# Altium PCB TS100C.PcbDoc
Units mm, origin at the board's own origin, x right, y up, seen from the top; angles counter-clockwise.
Board outline 144.27 x 66.42 mm, 2 copper layers (Top Layer, Bottom Layer); 63 components, 45 nets, 253 pads, 49 vias.
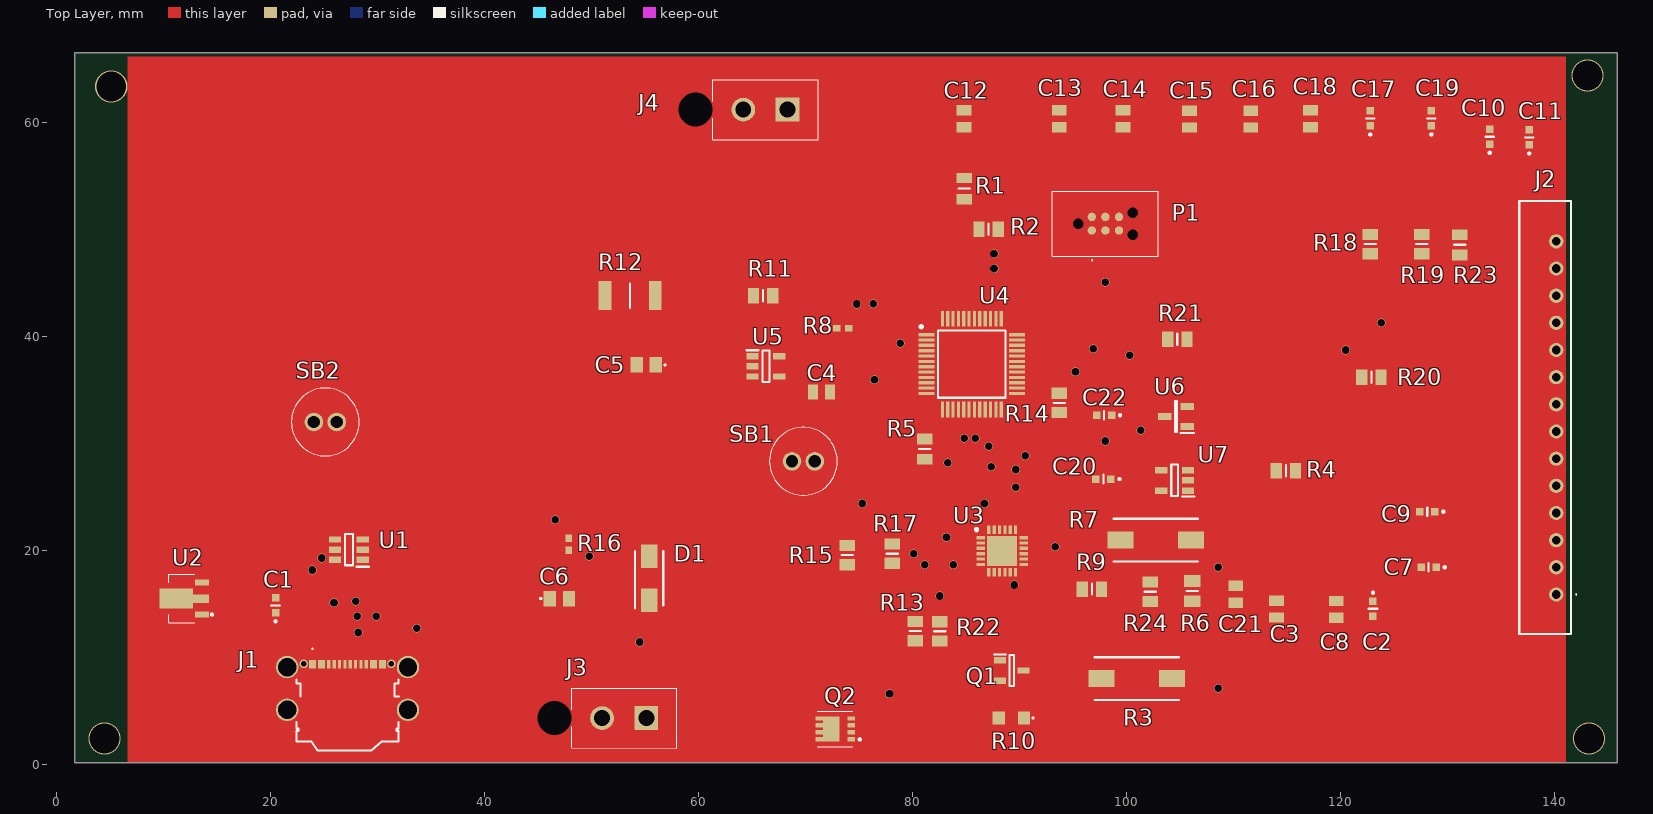
[diagram p0: Top Layer view]
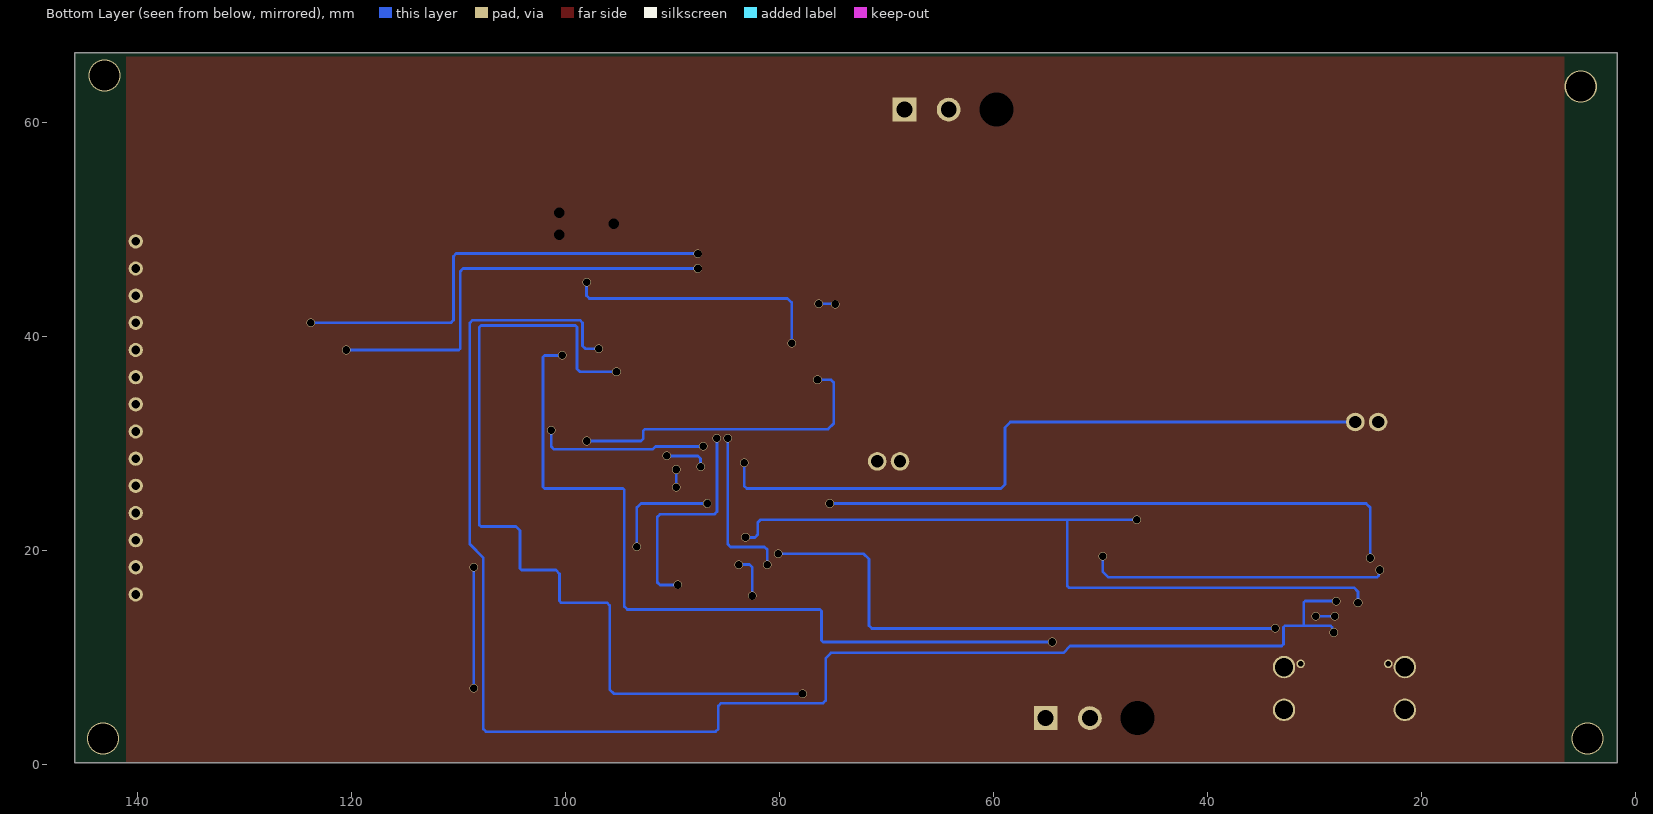
[diagram p1: Bottom Layer view, seen from below]
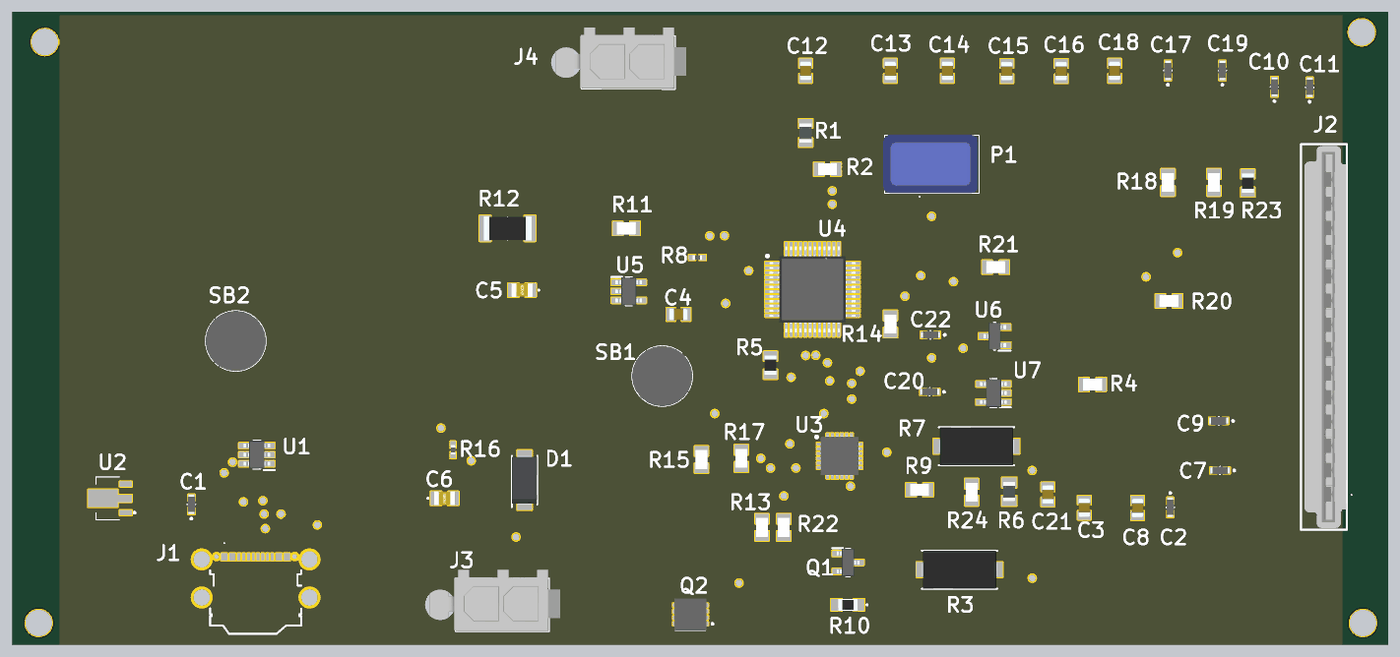
[diagram p2: 3D render of the assembled board from above, using the file's embedded part models]

## Layer stack, top to bottom
Top Solder: solder mask 0.0102, Solder Resist, Dk 3.5
Top Layer: signal copper 0.0356
Dielectric 1: dielectric 0.32, FR-4, Dk 4.8
Bottom Layer: signal copper 0.0356
Bottom Solder: solder mask 0.0102, Solder Resist, Dk 3.5

## Board outline
1.651,0.127 1.651,66.548 145.923,66.548 145.923,0.127

## Design rules (kind name [scope] priority, off if disabled: settings)
Clearance [All] p1: gap=0.254 ignorepadtopadclearanceinfootprint=FALSE
PolygonConnect [All] p1: connectstyle=Relief reliefconductorwidth=0.254 reliefentries=4 polygonreliefangle="90 Angle" airgapwidth=0.254
RoutingVias [All] p1: holewidth=0.711 width=1.27 viastyle="Through Hole" minholewidth=0.711 minwidth=1.27 maxholewidth=0.711 maxwidth=1.27
SolderMaskExpansion [All] p1: expansion=0.102 istentingtop=FALSE
Width [All] p1: maxlimit=0.254 minlimit=0.254 preferedwidth=0.254
30 further rules are at their usual default settings.

## Components (designator, comment, footprint, x,y, rotation, side; value= is the part's Value field where it differs from the comment)
C1 "MAJCT168BB7105KTEA01" MAJx16 20.447,14.859 r90 top
C2 "MAJCT168BB7105KTEA01" MAJx16 123.063,14.543 r270 top
C3 "MAASU21GSB7104MTCA01" CAPC2012X135N 114.046,14.506 r270 top
C4 "MAASU21GSB7104MTCA01" CAPC2012X135N 71.501,34.798 r0 top
C5 "C0805C180JAGACTU" C0805 55.107,37.338 r180 top
C6 "C0805C180JAGACTU" C0805 46.99,15.494 r0 top
C7 "MAJCT168BB7105KTEA01" MAJx16 128.27,18.415 r180 top
C8 "MAASU21GSB7104MTCA01" CAPC2012X135N 119.634,14.478 r270 top
C9 "MAJCT168BB7105KTEA01" MAJx16 128.143,23.622 r180 top
C10 "MAJCT168BB7105KTEA01" MAJx16 133.985,58.674 r90 top
C11 "MAJCT168BB7105KTEA01" MAJx16 137.668,58.612 r90 top
C12 "MAASU21GSB7104MTCA01" CAPC2012X135N 84.836,60.353 r270 top
C13 "MAASU21GSB7104MTCA01" CAPC2012X135N 93.726,60.353 r270 top
C14 "MAASU21GSB7104MTCA01" CAPC2012X135N 99.695,60.353 r270 top
C15 "MAASU21GSB7104MTCA01" CAPC2012X135N 105.918,60.325 r270 top
C16 "MAASU21GSB7104MTCA01" CAPC2012X135N 111.633,60.325 r270 top
C17 "MAJCT168BB7105KTEA01" MAJx16 122.809,60.39 r90 top
C18 "MAASU21GSB7104MTCA01" CAPC2012X135N 117.221,60.353 r270 top
C19 "MAJCT168BB7105KTEA01" MAJx16 128.524,60.39 r90 top
C20 "MAJCT168BB7105KTEA01" MAJx16 97.852,26.67 r180 top
C21 "MAASU21GSB7104MTCA01" CAPC2012X135N 110.236,15.903 r90 top
C22 "MAJCT168BB7105KTEA01" MAJx16 97.917,32.639 r180 top
D1 "B140-E3_61T" DIOM5127X229N 55.372,17.399 r90 top
J1 "USB4720-03-A" USB472003A 27.178,5.334 r0 top
J2 "6-520315-4" 65203154 140.208,15.875 r90 top
J3 "1-770166-0" 17701660 55.118,4.318 r180 top
J4 "1-770166-0" 17701660 68.326,61.214 r180 top
P1 "TC2030-CTX-NL" TC2030MCPNL10 98.044,50.345 r0 top
Q1 "SS8050-G" SOT95P240X115-3N 89.281,8.763 r0 top
Q2 "DMP3017SFG-7" DMP3007SFG7 72.771,3.302 r90 top
R1 "WSL080500000ZEA9" RESC2013X84N 84.836,53.832 r270 top
R2 "RN73C2A2K37BTG" RESC2012X65N 87.122,50.038 r0 top
R3 "SMQW133RJT" RESM7940X385N 100.965,8.001 r0 top
R4 "RN73C2A2K37BTG" RESC2012X65N 114.924,27.432 r0 top
R5 "CRCW0805560KJNEAHP" RESC2012X60N 81.153,29.464 r270 top
R6 "WSLP0805R0100DEA" RESC2013X58N 106.172,16.19 r270 top
R7 "SMQW133RJT" RESM7940X385N 102.743,20.955 r0 top
R8 "SFR01MZPF1003" RESC1005X40N 73.491,40.767 r0 top
R9 "RN73C2A2K37BTG" RESC2012X65N 96.774,16.383 r0 top
R10 "ERJ-UP6D20R0V" ERJUP6 89.249,4.318 r180 top
R11 "RN73C2A2K37BTG" RESC2012X65N 66.04,43.815 r180 top
R12 "RCV2010750KFKEFAT" RESC5025X70N 53.594,43.815 r180 top
R13 "RN73C2A2K37BTG" RESC2012X65N 80.264,12.446 r270 top
R14 "RN73C2A2K37BTG" RESC2012X65N 93.726,33.782 r270 top
R15 "RN73C2A2K37BTG" RESC2012X65N 73.914,19.558 r90 top
R16 "SFR01MZPF1003" RESC1005X40N 47.879,20.574 r270 top
R17 "RN73C2A2K37BTG" RESC2012X65N 78.105,19.685 r90 top
R18 "RN73C2A2K37BTG" RESC2012X65N 122.809,48.641 r90 top
R19 "RN73C2A2K37BTG" RESC2012X65N 127.635,48.641 r90 top
R20 "RN73C2A2K37BTG" RESC2012X65N 122.925,36.195 r180 top
R21 "RN73C2A2K37BTG" RESC2012X65N 104.764,39.751 r0 top
R22 "RN73C2A2K37BTG" RESC2012X65N 82.55,12.435 r270 top
R23 "CRCW0805560KJNEAHP" RESC2012X60N 131.191,48.575 r270 top
R24 "RN73C2A2K37BTG" RESC2012X65N 102.235,16.129 r90 top
SB1 "8631CQD2" 8631CQD2 68.736,28.321 r0 top
SB2 "8631CQD2" 8631CQD2 24.032,32.004 r0 top
U1 "USBLC6-4SC6" SOT95P280X145-6N 27.305,20.066 r180 top
U2 "AP2204R-3.3TRG1" AP2204R33TRG1 12.899,15.494 r90 top
U3 "STUSB4500QTR" QFN50P400X400X100-25N-D 88.392,19.939 r0 top
U4 "STM32F072C8T6" QFP50P900X900X160-48N 85.551,37.421 r0 top
U5 "OPA340NA" SOT95P280X145-5N 66.294,37.211 r0 top
U6 "MCP9700T-H_TTVAO" SOT95P237X112-3N 104.648,32.512 r180 top
U7 "SI8540-B-FWR" SOT95P280X145-5N 104.521,26.543 r180 top

## Footprints (in the part's own frame and the unit in brackets; to place one, negate y for a bottom-side part, rotate by r counter-clockwise, add the part's x,y. Pads: shape width x height; smd on the part's side, far side on the other; paste and mask are expansions set on the pad)
8631CQD2 [mm]
  round 1.74 hole 1.16: 1(0,0) 2(2.13,0)
  silkscreen extent -2.11,-3.17 4.24,3.17, body extent -2.11,-3.17 4.24,3.17, height 14.03
17701660 [mm]
  rect 2.22x2.22 hole 1.48: 1(0,0)
  round 2.22 hole 1.48: 2(4.14,0)
  round 1.59 hole 3.18 unplated: 3(8.59,0)
  silkscreen extent -2.85,-2.8 6.98,2.8, body extent -4.01,-3.67 9.68,2.68, height 14.29
65203154 [mm]
  round 1.333 hole 0.82: 1(0,0) 2(2.54,0) 3(5.08,0) 4(7.62,0) 5(10.16,0) 6(12.7,0) 7(15.24,0) 8(17.78,0) 9(20.32,0) 10(22.86,0) 11(25.4,0) 12(27.94,0) 13(30.48,0) 14(33.02,0)
  silkscreen extent -3.68,-1.9 36.78,3.46, body extent -3.49,-1.32 36.59,3.08, height 9.1
AP2204R33TRG1 [mm]
  rect 0.55x1.3 smd: 1(-1.5,-0.665) 3(1.5,-0.665)
  rect 0.8x1.475 smd: 2(0,-0.578)
  rect 1.85x3.125 smd: 4(0,1.723)
  silkscreen extent -2.25,-1.7 2.25,2.45
C0805 [mm]
  rect 1.15x1.45 smd: 1(-0.9,0) 2(0.9,0)
  silkscreen extent -1.8,-0.05 -1.7,0.05, body extent -1.1,-0.73 1.1,0.72, height 0.88
CAPC2012X135N [mm]
  rect 0.96x1.39 smd: 1(-0.79,0) 2(0.79,0)
  body extent -1,-0.63 1,0.63, height 1.35
DIOM5127X229N [mm]
  rect 2.2x1.55 smd: 1(-2.05,0) 2(2.05,0)
  silkscreen extent -2.83,-1.33 2.55,1.33, body extent -2.55,-1.33 2.55,1.33, height 2.29
DMP3007SFG7 [mm]
  rect 0.42x0.7 smd: 1(-0.975,-1.5) 2(-0.325,-1.5) 3(0.325,-1.5) 4(0.975,-1.5) 5(0.975,1.5) 6(0.325,1.5) 7(-0.325,1.5) 8(-0.975,1.5)
  rect 2.37x1.55 smd: 9(0,0.375)
  silkscreen extent -1.65,-2.4 1.65,1.65, body extent -1.68,-1.68 1.68,1.68, height 0.71
ERJUP6 [mm]
  rect 1.15x1.25 smd: 1(-1.175,0) 2(1.175,0)
  silkscreen extent -2.07,-0.05 -1.98,0.05, body extent -1,-0.63 1,0.63, height 0.6
MAJx16 [mm]
  rect 0.7x0.7 smd: 1(-0.7,0) 2(0.7,0)
  silkscreen extent -1.6,-0.4 0,0.4, body extent -0.98,-0.4 0.98,0.4, height 0.9
QFN50P400X400X100-25N-D [mm]
  rect 0.8x0.3 smd: 1(-2,1.25) 2(-2,0.75) 3(-2,0.25) 4(-2,-0.25) 5(-2,-0.75) 6(-2,-1.25) 13(2,-1.25) 14(2,-0.75) 15(2,-0.25) 16(2,0.25) 17(2,0.75) 18(2,1.25)
  rect 0.3x0.8 smd: 7(-1.25,-2) 8(-0.75,-2) 9(-0.25,-2) 10(0.25,-2) 11(0.75,-2) 12(1.25,-2) 19(1.25,2) 20(0.75,2) 21(0.25,2) 22(-0.25,2) 23(-0.75,2) 24(-1.25,2)
  rect 2.8x2.8 smd: 25(0,0)
  silkscreen extent -2.52,1.88 -2.27,2.12, body extent -2.05,-2.05 2.05,2.05, height 1
QFP50P900X900X160-48N [mm]
  rect 1.475x0.3 smd: 1(-4.238,2.75) 2(-4.238,2.25) 3(-4.238,1.75) 4(-4.238,1.25) 5(-4.238,0.75) 6(-4.238,0.25) 7(-4.238,-0.25) 8(-4.238,-0.75) 9(-4.238,-1.25) 10(-4.238,-1.75) 11(-4.238,-2.25) 12(-4.238,-2.75) 25(4.238,-2.75) 26(4.238,-2.25) 27(4.238,-1.75) 28(4.238,-1.25) 29(4.238,-0.75) 30(4.238,-0.25) 31(4.238,0.25) 32(4.238,0.75) 33(4.238,1.25) 34(4.238,1.75) 35(4.238,2.25) 36(4.238,2.75)
  rect 0.3x1.475 smd: 13(-2.75,-4.238) 14(-2.25,-4.238) 15(-1.75,-4.238) 16(-1.25,-4.238) 17(-0.75,-4.238) 18(-0.25,-4.238) 19(0.25,-4.238) 20(0.75,-4.238) 21(1.25,-4.238) 22(1.75,-4.238) 23(2.25,-4.238) 24(2.75,-4.238) 37(2.75,4.238) 38(2.25,4.238) 39(1.75,4.238) 40(1.25,4.238) 41(0.75,4.238) 42(0.25,4.238) 43(-0.25,4.238) 44(-0.75,4.238) 45(-1.25,4.238) 46(-1.75,4.238) 47(-2.25,4.238) 48(-2.75,4.238)
  silkscreen extent -4.85,-3.15 3.15,3.62, body extent -4.5,-4.5 4.5,4.5, height 1.6
RESC1005X40N [mm]
  rect 0.7x0.6 smd: 1(-0.55,0) 2(0.55,0)
  body extent -0.5,-0.25 0.5,0.25, height 0.4
RESC2012X60N [mm]
  rect 1x1.45 smd: 1(-0.95,0) 2(0.95,0)
  silkscreen extent 0,-0.53 0,0.53, body extent -1,-0.63 1,0.63, height 0.6
RESC2012X65N [mm]
  rect 1.05x1.45 smd: 1(-0.9,0) 2(0.9,0)
  silkscreen extent 0,-0.53 0,0.53, body extent -1,-0.63 1,0.63, height 0.56
RESC2013X58N [mm]
  rect 1.1x1.55 smd: 1(-0.95,0) 2(0.95,0)
  silkscreen extent 0,-0.54 0,0.54, body extent -1.01,-0.64 1.01,0.64, height 0.36
RESC2013X84N [mm]
  rect 0.95x1.45 smd: 1(-1,0) 2(1,0)
  silkscreen extent 0,-0.54 0,0.54, body extent -1.01,-0.64 1.01,0.64, height 0.36
RESC5025X70N [mm]
  rect 1.2x2.7 smd: 1(-2.35,0) 2(2.35,0)
  silkscreen extent 0,-1.15 0,1.15, body extent -2.5,-1.25 2.5,1.25, height 0.7
RESM7940X385N [mm]
  rect 2.45x1.6 smd: 1(-3.3,0) 2(3.3,0)
  silkscreen extent -3.95,-2 3.95,2, body extent -3.95,-2 3.95,2, height 3.85
SOT95P237X112-3N [mm]
  rect 1.25x0.65 smd: 1(-1.05,0.95) 2(-1.05,-0.95) 3(1.05,0)
  silkscreen extent -1.68,-1.43 0.08,1.53, body extent -1.18,-1.43 1.18,1.43, height 1.12
SOT95P240X115-3N [mm]
  rect 1.1x0.6 smd: 1(-1.1,0.95) 2(-1.1,-0.95) 3(1.1,0)
  silkscreen extent -1.65,-1.45 0.2,1.5, body extent -1.2,-1.45 1.2,1.45, height 1.15
SOT95P280X145-5N [mm]
  rect 1.15x0.6 smd: 1(-1.25,0.95) 2(-1.25,0) 3(-1.25,-0.95) 4(1.25,-0.95) 5(1.25,0.95)
  silkscreen extent -1.83,-1.48 0.33,1.5, body extent -1.4,-1.48 1.4,1.48, height 1.45
SOT95P280X145-6N [mm]
  rect 1.15x0.6 smd: 1(-1.3,0.95) 2(-1.3,0) 3(-1.3,-0.95) 4(1.3,-0.95) 5(1.3,0) 6(1.3,0.95)
  silkscreen extent -1.88,-1.46 0.38,1.6, body extent -1.4,-1.46 1.4,1.46, height 1.45
TC2030MCPNL10 [mm]
  round 0.787 smd: 1(-1.27,-0.434) 2(-1.27,0.836) 3(0,-0.434) 4(0,0.836) 5(1.27,-0.434) 6(1.27,0.836)
  round 0.495 hole 0.991 unplated: 7(-2.54,0.201) 8(2.54,1.217) 9(2.54,-0.815)
  silkscreen extent -4.95,-3.25 4.95,3.25, body extent -5.06,-2.82 4.84,3.28, height 28.83
USB472003A [mm]
  rect 0.65x0.8 smd: A1(-3.28,4) A4(-2.43,4) A9(2.43,4) A12(3.28,4)
  rect 0.3x0.8 smd: A5(-1.25,4) A6(-0.25,4) A7(0.25,4) A8(1.25,4) B5(1.75,4) B6(0.75,4) B7(-0.75,4) B8(-1.75,4)
  round 0.8 hole 0.5: MH1(-4.1,4.05) MH2(4.1,4.05)
  round 2.1 hole 1.72: MH3(-5.65,3.75) MH4(5.65,3.75) MH5(-5.65,-0.25) MH6(5.65,-0.25)
  silkscreen extent -4.77,-4.05 4.8,5.5, body extent -20.8,-1.87 -9.2,1.87

## Part data
C1 C2 C7 C9 C10 C11 C17 C19 C20 C22: "Capacitor", Manufacturer_Name="TAIYO YUDEN", Datasheet Link=https://ds.yuden.co.jp/TYCOMPAS/or/detail?pn=MAJCT168BB7105KTEA01, Height=0.8mm, Manufacturer_Part_Number=MAJCT168BB7105KTEA01
C3 C4 C8 C12 C13 C14 C15 C16 C18 C21: "Capacitor", Manufacturer_Name="TAIYO YUDEN", Mouser Part Number=963-MAASU21GSB7104M, Datasheet Link=https://ds.yuden.co.jp/TYCOMPAS/ap/detail?pn=MAASU21GSB7104MTCA01&u=M, Height=1.35mm, Manufacturer_Part_Number=MAASU21GSB7104MTCA01, Mouser Price/Stock=https://www.mouser.co.uk/ProductDetail/TAIYO-YUDEN/MAASU21GSB7104MTCA01?qs=HFfMDpzxxd3%252BHMM46uQdgg%3D%3D
C5 C6: "Capacitor", Manufacturer_Name=KEMET, Mouser Part Number=80-C0805C180JAGACTU, Datasheet Link=https://content.kemet.com/datasheets/KEM_C1003_C0G_SMD.pdf, Height=1.1mm, Manufacturer_Part_Number=C0805C180JAGACTU, Mouser Price/Stock=https://www.mouser.co.uk/ProductDetail/KEMET/C0805C180JAGACTU?qs=rrS6PyfT74e3xQakzGupuw%3D%3D
D1: "Schottky Diode", Arrow Part Number=B140-E3/61T, Manufacturer_Name=Vishay, Mouser Part Number=625-B140-E3/61T, Arrow Price/Stock=https://www.arrow.com/en/products/b140-e361t/vishay?region=nac, Datasheet Link=https://componentsearchengine.com/Datasheets/2/B140-E3_61T.pdf, Height=2.29mm, Manufacturer_Part_Number=B140-E3/61T, Mouser Price/Stock=https://www.mouser.co.uk/ProductDetail/Vishay-General-Semiconductor/B140-E3-61T?qs=tdXsjSi%2FIMY8eBFzBOcYwA%3D%3D
J1: "Connector", Manufacturer_Name="GCT (GLOBAL CONNECTOR TECHNOLOGY)", Mouser Part Number=640-USB472003A, Datasheet Link=https://www.gct.co/files/drawings/USB4720.pdf, Height=3.9mm, Manufacturer_Part_Number=USB4720-03-A, Mouser Price/Stock=https://www.mouser.co.uk/ProductDetail/GCT/USB4720-03-A?qs=Z%252BL2brAPG1IK%252BbxHmYg8zQ%3D%3D
J2: "Connector", Manufacturer_Name="TE Connectivity", Mouser Part Number=571-6-520315-4, Arrow Part Number=6-520315-4, Arrow Price/Stock=https://www.arrow.com/en/products/6-520315-4/te-connectivity, Datasheet Link=https://www.te.com/commerce/DocumentDelivery/DDEController?Action=srchrtrv&DocNm=520315&DocType=Customer+Drawing&DocLang=English, Height=6.93mm, Manufacturer_Part_Number=6-520315-4, Mouser Price/Stock=https://www.mouser.co.uk/ProductDetail/TE-Connectivity/6-520315-4/?qs=lnVw2K6okukqGNss6X1ebA%3D%3D
J3 J4: "Connector", Manufacturer_Name="TE Connectivity", Mouser Part Number=571-1-770166-0, Arrow Part Number=1-770166-0, Arrow Price/Stock=https://www.arrow.com/en/products/1-770166-0/te-connectivity?region=europe, Datasheet Link=https://www.te.com/commerce/DocumentDelivery/DDEController?Action=showdoc&DocId=Customer+Drawing%7F770166%7FM%7Fpdf%7FEnglish%7FENG_CD_770166_M.pdf%7F1-770166-0, Height=14.25mm, Manufacturer_Part_Number=1-770166-0, Mouser Price/Stock=https://www.mouser.co.uk/ProductDetail/TE-Connectivity-AMP/1-770166-0?qs=m8myXnDJXpW%252BZqFFniy0cw%3D%3D
P1: "Connector", Manufacturer_Name="Tag Connect", Height=18mm, Manufacturer_Part_Number=TC2030-CTX-NL
Q1: "Transistor BJT NPN", Manufacturer_Name="Comchip Technology", Mouser Part Number=750-SS8050-G, Arrow Part Number=SS8050-G, Arrow Price/Stock=https://www.arrow.com/en/products/ss8050-g/comchip-technology?region=nac, Datasheet Link=https://datasheet.datasheetarchive.com/originals/distributors/DKDS-12/229454.pdf, Height=1.15mm, Manufacturer_Part_Number=SS8050-G, Mouser Price/Stock=https://www.mouser.co.uk/ProductDetail/Comchip-Technology/SS8050-G?qs=LLUE9lz1YbcHg%252BWLMAtcrQ%3D%3D
Q2: "MOSFET (P-Channel)", Manufacturer_Name="Diodes Incorporated", Mouser Part Number=621-DMP3017SFG-7, Arrow Part Number=DMP3017SFG-7, Arrow Price/Stock=https://www.arrow.com/en/products/dmp3017sfg-7/diodes-incorporated, Datasheet Link=https://www.diodes.com/assets/Datasheets/products_inactive_data/DMP3017SFG.pdf, Height=0.8mm, Manufacturer_Part_Number=DMP3017SFG-7, Mouser Price/Stock=https://www.mouser.co.uk/ProductDetail/Diodes-Incorporated/DMP3017SFG-7?qs=dOK1vf2izjuHbyAr8sMEAg%3D%3D
R1: "Resistor", Manufacturer_Name=Vishay, Mouser Part Number=71-WSL080500000ZEA9, Arrow Part Number=WSL080500000ZEA9, Arrow Price/Stock=https://www.arrow.com/en/products/wsl080500000zea9/vishay?region=nac, Datasheet Link=https://ad.componentsearchengine.com/Datasheets/2/WSL080500000ZEA9.pdf, Height=0.838mm, Manufacturer_Part_Number=WSL080500000ZEA9, Mouser Price/Stock=https://www.mouser.co.uk/ProductDetail/Vishay-Dale/WSL080500000ZEA9?qs=f1l5vAGoKgsImKS87N8TmQ%3D%3D
R2 R3 R4 R7 R9 R11 R13 R14 R15 R17 R18 R19 R20 R21 R22 R24: "Resistor", Manufacturer_Name="TE Connectivity"
  R2 R4 R9 R11 R13 R14 R15 R17 R18 R19 R20 R21 R22 R24: Datasheet Link=http://docs-europe.electrocomponents.com/webdocs/1488/0900766b814885e5.pdf, Height=0.65mm, Manufacturer_Part_Number=RN73C2A2K37BTG
  R3 R7: Datasheet Link=https://www.mouser.com/datasheet/2/418/9/ENG_DS_1773242_2_A2-3315018.pdf, Height=3.85mm, Manufacturer_Part_Number=SMQW133RJT
R5 R23: "Resistor", Manufacturer_Name=Vishay, Mouser Part Number=71-CRCW0805560KJNEAH, Datasheet Link=https://componentsearchengine.com/Datasheets/1/CRCW08051R00FKEAHP.pdf, Height=0.6mm, Manufacturer_Part_Number=CRCW0805560KJNEAHP, Mouser Price/Stock=https://www.mouser.co.uk/ProductDetail/Vishay-Dale/CRCW0805560KJNEAHP?qs=0aKCkHzzSeQDG3izC1p2kA%3D%3D
R6: "Resistor", Manufacturer_Name=Vishay, Mouser Part Number=71-WSLP0805R0100DEA, Datasheet Link=https://componentsearchengine.com/Datasheets/1/WSLP0805R0100DEA.pdf, Height=0.584mm, Manufacturer_Part_Number=WSLP0805R0100DEA, Mouser Price/Stock=https://www.mouser.co.uk/ProductDetail/Vishay-Dale/WSLP0805R0100DEA?qs=l%252BoLuM8chxox98xrLk2FIg%3D%3D
R8 R16: "Resistor", Manufacturer_Name="ROHM Semiconductor", Mouser Part Number=755-SFR01MZPF1003, Datasheet Link=https://fscdn.rohm.com/en/products/databook/datasheet/passive/resistor/chip_resistor/sfr-e.pdf, Height=0.4mm, Manufacturer_Part_Number=SFR01MZPF1003, Mouser Price/Stock=https://www.mouser.co.uk/ProductDetail/ROHM-Semiconductor/SFR01MZPF1003?qs=Mv7BduZupUj2RFL5gMaKTg%3D%3D
R10: "Resistor", Manufacturer_Name=Panasonic, Datasheet Link=https://industrial.panasonic.com/cdbs/www-data/pdf/RDP0000/AOA0000C337.pdf, Height=0.7mm, Manufacturer_Part_Number=ERJ-UP6D20R0V
R12: "Resistor", Manufacturer_Name=Vishay, Mouser Part Number=71-RCV2010750KFKEFAT, Datasheet Link=https://www.vishay.com/docs/20082/rcvat-e3.pdf, Height=0.7mm, Manufacturer_Part_Number=RCV2010750KFKEFAT, Mouser Price/Stock=https://www.mouser.co.uk/ProductDetail/Vishay-Draloric/RCV2010750KFKEFAT?qs=hWgE7mdIu5SyrxPUQqiMpQ%3D%3D
SB1 SB2: "Switch (2-Pin Push)", Manufacturer_Name="C & K COMPONENTS", Mouser Part Number=611-8631-261, Datasheet Link=https://www.ckswitches.com/media/1396/8600.pdf, Height=13.93mm, Manufacturer_Part_Number=8631CQD2, Mouser Price/Stock=https://www.mouser.co.uk/ProductDetail/CK/8631CQD2?qs=ktcBc77oICXe9iPhfEwnkA%3D%3D
U1: "Integrated Circuit", Manufacturer_Name=STMicroelectronics, Mouser Part Number=511-USBLC6-4SC6, Arrow Part Number=USBLC6-4SC6, Arrow Price/Stock=https://www.arrow.com/en/products/usblc6-4sc6/stmicroelectronics?region=nac, Datasheet Link=http://www.st.com/st-web-ui/static/active/en/resource/technical/document/datasheet/CD00047494.pdf, Height=1.45mm, Manufacturer_Part_Number=USBLC6-4SC6, Mouser Price/Stock=https://www.mouser.co.uk/ProductDetail/STMicroelectronics/USBLC6-4SC6?qs=k9dH%2Fx4GHJCNdehb8zInZg%3D%3D
U2: "Integrated Circuit", Manufacturer_Name="Diodes Incorporated", Mouser Part Number=621-AP2204R-3.3TRG1, Arrow Part Number=AP2204R-3.3TRG1, Arrow Price/Stock=https://www.arrow.com/en/products/ap2204r-3.3trg1/diodes-incorporated?region=nac, Datasheet Link=https://datasheet.datasheetarchive.com/originals/distributors/Datasheets_SAMA/5d52b656135dbfe7dbe35c76df69cd37.pdf, Height=3mm, Manufacturer_Part_Number=AP2204R-3.3TRG1, Mouser Price/Stock=https://www.mouser.co.uk/ProductDetail/Diodes-Incorporated/AP2204R-3.3TRG1?qs=x6A8l6qLYDBeOWjkU%252BFKYw%3D%3D
U3: "Integrated Circuit", Manufacturer_Name=STMicroelectronics, Mouser Part Number=511-STUSB4500QTR, Arrow Part Number=STUSB4500QTR, Arrow Price/Stock=https://www.arrow.com/en/products/stusb4500qtr/stmicroelectronics?region=europe, Datasheet Link=https://www.st.com/resource/en/datasheet/stusb4500.pdf, Height=1mm, Manufacturer_Part_Number=STUSB4500QTR, Mouser Price/Stock=https://www.mouser.co.uk/ProductDetail/STMicroelectronics/STUSB4500QTR?qs=wUXugUrL1qyQbYMSzG1ujg%3D%3D
U4: "Integrated Circuit", Manufacturer_Name=STMicroelectronics, Mouser Part Number=511-STM32F072C8T6, Arrow Part Number=STM32F072C8T6, Arrow Price/Stock=https://www.arrow.com/en/products/stm32f072c8t6/stmicroelectronics?region=europe, Datasheet Link=https://componentsearchengine.com/Datasheets/2/STM32F072C8T6.pdf, Height=1.6mm, Manufacturer_Part_Number=STM32F072C8T6, Mouser Price/Stock=https://www.mouser.co.uk/ProductDetail/STMicroelectronics/STM32F072C8T6?qs=4b8myOmUP%252BsnybMOCvNZeA%3D%3D
U5: "Integrated Circuit", Manufacturer_Name="Texas Instruments", Datasheet Link=https://www.ti.com/lit/ds/symlink/opa4340.pdf?hkey=EF798316E3902B6ED9A73243A3159BB0, Height=1.45mm, Manufacturer_Part_Number=OPA340NA
U6: "Integrated Circuit", Arrow Part Number=MCP9700T-H/TTVAO, Manufacturer_Name=Microchip, Mouser Part Number=579-MCP9700T-H/TTVAO, Arrow Price/Stock=https://www.arrow.com/en/products/mcp9700t-httvao/microchip-technology?region=nac, Datasheet Link=https://www.mouser.com/datasheet/2/268/20001942G-1820450.pdf, Height=1.12mm, Manufacturer_Part_Number=MCP9700T-H/TTVAO, Mouser Price/Stock=https://www.mouser.co.uk/ProductDetail/Microchip-Technology/MCP9700T-H-TTVAO?qs=5aG0NVq1C4zDcteb3AGtGQ%3D%3D
U7: "Integrated Circuit", Manufacturer_Name="Silicon Labs", Mouser Part Number=634-SI8540-B-FWR, Arrow Part Number=SI8540-B-FWR, Arrow Price/Stock=https://www.arrow.com/en/products/si8540-b-fwr/silicon-labs, Datasheet Link=https://www.silabs.com/documents/public/data-sheets/Si8540.pdf, Height=1.45mm, Manufacturer_Part_Number=SI8540-B-FWR, Mouser Price/Stock=https://www.mouser.co.uk/ProductDetail/Silicon-Labs/SI8540-B-FWR?qs=DPMK3kMt%252Bod456L9OnEl5Q%3D%3D

## Via types
v1: diameter 0.8, hole 0.711, Top Layer to Bottom Layer, 45 vias
v2: diameter 3, hole 2.8, Top Layer to Bottom Layer, 4 vias

## Nets (pads, with @x,y where several pads share a name; then routed paths per layer and width w, separated by ;. In a path a pad name is that pad's centre, name@x,y a point inside that pad or via, vN(x,y) a via of type N, cw(c..) or ccw(c..) an arc to the next point about the centre after c; other vN are vias at no path point)
+3V3: C2.1 C8.1 C12.2 C13.2 C14.2 C15.2 C16.2 C17.1 C18.2 C19.1 J2.5 J2.8 P1.1 R1.1 R14.2 R15.2 R17.2 R18.2 R19.2 R20.2 SB1.1 SB2.1 U1.5 U2.3 U3.22 U4.1 U4.9 U4.24 U4.36 U4.48 U5.5 U6.1 | length 401.7
  Top Layer w0.254: U2.3 13.589,17.019 13.589,19.685 13.97,20.066 23.876,20.066 ; v1(23.876,18.161) 23.876,20.066 ; SB2.1 23.876,31.848 23.876,20.066 ; U1.5 23.876,20.066 ; v1(49.784,19.431) 49.784,21.844 50.165,22.225 65.913,22.225 ; U5.5 67.605,38.1 68.58,38.1 ; SB1.1 68.736,33.655 ; R15.2 73.914,22.098 73.787,22.225 ; v1(74.784,43.034) 74.765,43.053 69.088,43.053 68.736,42.701 68.736,33.655 ; v1(76.327,43.053) 77.828,43.053 ; R17.2 78.105,22.076 77.956,22.225 73.787,22.225 ; 79.651,36.171 U4.9 ; 79.651,36.195 79.627,36.195 79.372,36.45 77.977,36.45 77.828,36.599 77.828,40.259 ; U4.48 82.801,42.904 82.652,43.053 81.313,43.053 ; R1.1 84.836,57.404 ; C12.2 84.836,57.404 ; U3.22 88.142,26.075 88.138,26.079 88.138,26.499 88.142,26.503 88.142,31.115 ; U4.24 88.301,40.08 88.392,40.171 ; U4.24@88.332,32.92 88.332,32.288 88.142,32.098 88.142,31.115 ; U4.36 88.392,40.171 ; R14.2 93.726,31.369 93.472,31.115 88.142,31.115 ; C13.2 93.726,57.404 ; P1.1 96.774,48.895 96.52,48.641 94.107,48.641 93.726,49.022 93.726,57.404 ; C14.2 99.695,57.531 99.822,57.404 ; U6.1 119.573,31.562 119.634,31.623 ; C15.2 105.918,57.404 ; C16.2 111.633,57.404 ; C18.2 117.221,57.404 ; C8.1@119.659,15.243 C8.1 119.634,17.907 ; R20.2 119.612,36.195 ; R18.2 122.809,55.245 ; C17.1 122.809,57.404 ; C2.1 123.063,17.653 122.809,17.907 119.634,17.907 ; R19.2 127.635,55.096 127.486,55.245 122.809,55.245 ; C19.1 128.524,57.785 128.143,57.404 122.809,57.404 ; J2.5 119.634,26.035 ; J2.8 119.634,33.655 ; 65.913,22.225 73.787,22.225 ; 65.913,22.225 65.913,33.147 66.421,33.655 68.736,33.655 ; 77.828,40.259 77.828,43.053 ; 77.828,40.259 77.885,40.202 82.208,40.202 82.245,40.165 82.456,40.165 82.462,40.171 88.392,40.171 ; 77.828,43.053 81.313,43.053 ; 81.313,43.053 81.313,57.001 81.716,57.404 84.836,57.404 ; 84.836,57.404 93.726,57.404 ; 93.726,57.404 99.822,57.404 ; 99.822,57.404 105.918,57.404 ; 105.918,57.404 111.633,57.404 ; 111.633,57.404 117.221,57.404 ; 117.221,57.404 119.623,57.404 ; 119.612,36.195 119.634,36.173 119.634,33.655 ; 119.612,36.195 119.612,38.724 119.623,38.735 119.623,57.404 ; 119.623,57.404 122.809,57.404 ; 119.634,17.907 119.634,26.035 ; 119.634,26.035 119.634,31.623 ; 119.634,31.623 119.634,33.655 ; 122.809,55.245 122.809,57.404
  Bottom Layer w0.254: v1(23.876,18.161) 23.98,18.057 23.98,17.63 24.129,17.482 49.232,17.482 49.784,18.034 v1(49.784,19.431) ; v1(74.784,43.034) 74.803,43.053 v1(76.327,43.053)
GND: C1.2 C2.2 C3.2 C4.1 C5.2 C6.1 C8.2 C10.2 C11.2 C12.1 C13.1 C14.1 C15.1 C16.1 C17.2 C18.1 C19.2 C20.1 C21.2 C22.1 D1.2 J1.A1 J1.MH1 J1.MH2 J1.MH3 J1.MH4 J1.MH5 J1.MH6 J2.7 J4.1 P1.5 Q1.2 R2.2 R4.2 R8.1 R12.2 R22.2 R23.1 U1.2 U2.2 U2.4 U3.10 U3.12 U3.13 U4.8 U4.23 U4.35 U4.47 U5.2 U5.4 U6.3 U7.2 U7.3
NetC3_1: C3.1 R4.1 U4.10 U7.4 | length 68.1
  Top Layer w0.254: v1(76.454,35.941) 78.486,35.941 78.74,35.687 U4.10@81.313,35.687 ; v1(98.044,30.226) 103.271,30.226 ; U7.4 103.271,30.226 ; C3.1@114.046,15.423 114.046,27.432 114.046,30.077 113.897,30.226 103.271,30.226
  Bottom Layer w0.254: v1(76.454,35.941) 75.184,35.941 74.93,35.687 74.93,31.877 75.47,31.337 92.593,31.337 92.742,31.188 92.742,30.448 92.964,30.226 v1(98.044,30.226)
NetC4_2: C4.2 R5.1 R8.2 U4.12 | length 20.5
  Top Layer w0.254: C4.2@72.312,34.848 72.489,34.671 74.041,34.671 ; R8.2@74.041,40.478 74.041,34.671 ; 79.502,34.622 79.502,30.861 79.949,30.414 R5.1 ; U4.12 74.041,34.671
NetC5_1: C5.1 R11.2 R12.1 U5.1 | length 21.2
  Top Layer w0.254: R12.1 55.944,40.64 ; C5.1 55.944,37.401 55.944,40.64 ; R11.2@65.002,43.815 65.002,40.64 ; U5.1 65.002,38.203 65.002,40.64 ; 55.944,40.64 65.002,40.64
NetC7_1: C7.1 J2.2 | length 11.2
  Top Layer w0.254: C7.1 J2.2
NetC7_2: C7.2 J2.1 | length 15
  Top Layer w0.254: C7.2 127.57,16.194 127.889,15.875 J2.1
NetC9_1: C9.1 J2.4 | length 11.4
  Top Layer w0.254: C9.1 128.907,23.558 140.144,23.558 J2.4
NetC9_2: C9.2 J2.3 | length 15.4
  Top Layer w0.254: C9.2@127.419,23.598 C9.2 127.443,21.147 127.635,20.955 J2.3
NetC10_1: C10.1 J2.13 | length 17.6
  Top Layer w0.254: C10.1 133.985,46.736 134.366,46.355 J2.13
NetC11_1: C11.1 J2.14 | length 11.3
  Top Layer w0.254: C11.1 139.827,57.912 140.208,57.531 J2.14
NetC20_2: C20.2 U3.21 | length 13
  Top Layer w0.254: U3.21@88.65,21.939 88.65,26.293 89.027,26.67 C20.2
NetC22_2: C22.2 U3.23 | length 20.4
  Top Layer w0.254: v1(87.361,27.813) 87.376,27.798 87.376,24.892 87.63,24.638 U3.23@87.63,21.939 ; v1(90.551,28.829) 97.028,28.829 97.217,29.018 C22.2
  Bottom Layer w0.254: v1(87.361,27.813) 87.395,27.847 87.395,28.594 87.63,28.829 v1(90.551,28.829)
NetJ1_A5: J1.A5 U1.4 U3.1 U3.2 | length 106.2
  Top Layer w0.254: v1(25.908,15.113) 25.928,15.093 J1.A5 ; U1.4 26.035,21.046 26.035,22.352 26.543,22.86 v1(46.609,22.86) ; v1(83.185,21.209) 83.195,21.199 84.328,21.199 ; U3.2 84.499,20.689 84.306,20.881 84.306,21.177 84.328,21.199 ; U3.1 86.382,21.199 84.328,21.199
  Bottom Layer w0.254: v1(25.908,15.113) 25.908,16.129 26.289,16.51 52.937,16.51 53.086,16.659 53.086,22.86 ; v1(46.609,22.86) 53.086,22.86 ; v1(83.185,21.209) 82.296,21.209 82.042,21.463 82.042,22.606 81.788,22.86 53.086,22.86
NetJ1_A6: J1.A6 J1.B6 U1.6 U4.33 | length 167.8
  Top Layer w0.254: U1.6 26.005,17.429 26.289,17.145 26.67,17.145 26.928,16.887 26.928,15.24 ; J1.A6 26.928,15.24 ; v1(27.94,15.24) 26.928,15.24 ; J1.B6@27.944,9.334 27.944,10.668 28.194,10.918 v1(28.194,12.319) ; U4.33@89.789,38.679 v1@96.57,38.679
  Bottom Layer w0.254: v1(27.94,15.24) 27.962,15.262 30.839,15.262 30.988,15.113 30.988,12.954 ; 28.322,12.741 28.322,12.805 28.471,12.954 28.707,12.954 30.988,12.954 ; v1(96.901,38.862) 98.171,38.862 98.425,39.116 98.425,41.275 98.679,41.529 108.712,41.529 108.966,41.275 108.966,20.574 107.696,19.304 107.696,3.302 107.442,3.048 85.979,3.048 85.725,3.302 85.725,5.461 85.471,5.715 75.946,5.715 75.692,5.969 75.692,9.906 75.184,10.414 53.467,10.414 52.832,11.049 33.049,11.049 32.874,11.224 32.874,12.805 32.725,12.954 30.988,12.954
NetJ1_A7: J1.A7 J1.B7 U1.1 U4.32 | length 160.8
  Top Layer w0.254: J1.B7 26.428,1.292 26.577,1.143 41.021,1.143 41.402,1.524 41.402,11.43 ; J1.A7@27.436,9.334 27.436,13.593 27.633,13.79 28.014,13.79 v1(28.067,13.843) ; U1.1 31.176,19.116 31.369,18.923 31.369,13.843 ; v1(29.845,13.843) 31.369,13.843 ; v1(54.483,11.43) 41.402,11.43 ; U4.32 100.274,38.171 v1(100.33,38.227) ; 31.369,13.843 35.665,13.843 35.814,13.694 35.814,11.811 36.195,11.43 41.402,11.43
  Bottom Layer w0.254: v1(28.067,13.843) v1(29.845,13.843) ; v1(54.483,11.43) 75.924,11.43 76.073,11.579 76.073,14.329 76.222,14.478 94.234,14.478 94.51,14.754 94.51,25.632 94.659,25.781 101.981,25.781 102.13,25.93 102.13,38.078 101.981,38.227 v1(100.33,38.227)
NetJ1_B5: J1.B5 U1.3 U3.4 U3.5 | length 80.4
  Top Layer w0.254: U1.3 27.581,21.016 27.432,20.867 27.432,17.526 27.813,17.145 28.448,17.145 28.931,16.662 28.931,12.573 ; J1.B5@28.931,9.334 28.931,12.573 ; v1(33.655,12.7) 29.058,12.7 28.931,12.573 ; v1(80.137,19.685) 80.164,19.658 84.201,19.658 ; U3.5 84.35,19.189 84.201,19.338 84.201,19.658 ; U3.4@86.392,19.658 84.201,19.658
  Bottom Layer w0.254: v1(33.655,12.7) 71.374,12.7 71.628,12.954 71.628,19.177 72.136,19.685 v1(80.137,19.685)
NetJ2_9: J2.9 R20.1 | length 16.4
  Top Layer w0.254: R20.1 J2.9
NetJ2_10: J2.10 R18.1 U4.42 | length 75.4
  Top Layer w0.254: U4.42@85.817,41.659 85.817,46.228 85.944,46.355 v1(87.63,46.355) ; v1(120.523,38.735) 122.809,38.735 ; R18.1 122.809,38.735 ; J2.10 122.809,38.735
  Bottom Layer w0.254: v1(87.63,46.355) 109.601,46.355 109.855,46.101 109.855,38.884 110.004,38.735 v1(120.523,38.735)
NetJ2_11: J2.11 R19.1 U4.43 | length 73.3
  Top Layer w0.254: U4.43@85.309,41.659 85.309,47.244 85.817,47.752 v1(87.63,47.752) ; v1(123.825,41.275) 127.635,41.275 ; R19.1 127.635,41.275 ; J2.11 127.635,41.275
  Bottom Layer w0.254: v1(87.63,47.752) 110.236,47.752 110.49,47.498 110.49,41.529 110.744,41.275 v1(123.825,41.275)
NetJ2_12: J2.12 R23.2 | length 12.7
  Top Layer w0.254: R23.2 131.191,43.964 131.34,43.815 J2.12
NetP1_2: P1.2 U4.34 | length 46.6
  Top Layer w0.254: U4.34 91.031,39.171 91.047,39.187 95.956,39.187 96.52,39.751 100.203,39.751 100.606,40.154 100.606,40.662 100.801,40.857 106.643,40.857 107.188,41.402 107.188,54.991 106.934,55.245 97.028,55.245 96.774,54.991 P1.2
NetP1_3: P1.3 U4.7 | length 33.9
  Top Layer w0.254: v1(78.867,39.37) 78.867,37.338 79.034,37.171 U4.7 ; v1(98.044,45.085) P1.3
  Bottom Layer w0.254: v1(78.867,39.37) 78.867,43.18 79.248,43.561 97.79,43.561 98.044,43.815 v1(98.044,45.085)
NetP1_4: P1.4 U4.37 | length 42.8
  Top Layer w0.254: U4.37 106.404,41.659 106.553,41.808 106.553,54.356 106.299,54.61 98.298,54.61 98.044,54.356 P1.4
NetQ1_1: Q1.1 R13.2 | length 9.7
  Top Layer w0.254: R13.2 80.264,10.033 80.584,9.713 Q1.1 Q1.1@88.115,9.779
NetQ1_3: Q1.3 R9.1 R10.1 | length 19.4
  Top Layer w0.254: R10.1@90.381,4.361 R10.1 92.075,4.318 92.456,4.699 92.456,8.763 ; Q1.3 92.456,8.763 ; R9.1 95.747,16.51 92.837,16.51 92.456,16.129 92.456,8.763
NetQ2_1: Q2.1 R6.1 R7.2 | length 56.6
  Top Layer w0.254: Q2.1 108.436,2.327 108.585,2.476 v1(108.585,7.112) ; R7.2 106.172,20.826 106.172,18.415 ; R6.1 106.172,18.415 ; v1(108.585,18.415) 106.172,18.415
  Bottom Layer w0.254: v1(108.585,7.112) v1(108.585,18.415)
NetQ2_4: Q2.4 R10.2 | length 13.4
  Top Layer w0.254: 74.644,4.318 R10.2
NetR1_2: R1.2 R2.1 U4.44 | length 12.8
  Top Layer w0.254: U4.44 84.801,50.038 ; R1.2 84.801,52.797 84.801,50.038 ; R2.1@86.095,50.165 R2.1 84.801,50.038
NetR3_2: R3.2 U7.1 | length 31.9
  Top Layer w0.254: R3.2 112.141,8.001 112.395,8.255 112.395,25.019 111.887,25.527 105.837,25.527 U7.1
NetR7_1: R7.1 U7.5 | length 8.3
  Top Layer w0.254: R7.1 99.443,25.148 99.949,25.654 103.21,25.654 U7.5
NetR11_1: R11.1 U4.11 | length 22.5
  Top Layer w0.254: R11.1@66.802,43.815 75.184,43.815 75.565,43.434 75.565,35.433 75.819,35.179 U4.11@81.026,35.179
NetR13_1: R13.1 U4.29 | length 96.5
  Top Layer w0.254: v1(77.851,6.604) 77.216,6.604 76.962,6.858 76.962,13.081 77.227,13.346 R13.1 ; U4.29 95.218,36.671 v1(95.25,36.703)
  Bottom Layer w0.254: v1(77.851,6.604) 95.504,6.604 95.885,6.985 95.885,14.859 96.139,15.113 100.435,15.113 100.584,15.262 100.584,17.78 100.562,17.802 100.921,18.161 104.118,18.161 104.267,18.31 104.267,21.844 104.648,22.225 107.928,22.225 108.077,22.374 108.077,40.872 107.928,41.021 99.082,41.021 98.933,40.872 98.933,36.957 98.679,36.703 v1(95.25,36.703)
NetR14_1: R14.1 U3.19 U4.25 | length 27.2
  Top Layer w0.254: U3.19 89.652,21.949 89.652,25.898 v1(89.662,25.908) ; v1(89.662,27.559) 89.662,29.823 89.938,30.099 94.996,30.099 95.25,30.353 95.25,35.538 95.101,35.687 92.097,35.687 91.948,35.538 91.948,34.64 ; U4.25@89.789,34.64 91.948,34.64 ; R14.1 93.684,34.64 91.948,34.64
  Bottom Layer w0.254: v1(89.662,25.908) v1(89.662,27.559)
NetR15_1: R15.1 U3.8 U4.22 | length 43.2
  Top Layer w0.254: R15.1 73.914,16.913 74.063,16.764 87.63,16.764 ; v1(85.89,30.499) 85.994,30.603 85.994,30.966 86.143,31.115 87.1,31.115 87.249,31.264 U4.22@87.249,33.183 ; U3.8@87.63,17.939 87.63,16.764 ; v1(89.535,16.764) 87.63,16.764
  Bottom Layer w0.254: v1(85.89,30.499) 85.852,30.461 85.852,23.622 86.106,23.368 91.186,23.368 91.44,23.114 91.44,17.018 91.186,16.764 v1(89.535,16.764)
NetR16_1: R16.1 U5.3 | length 31.9
  Top Layer w0.254: R16.1 47.879,23.114 48.26,23.495 64.643,23.495 65.105,23.957 65.105,36.2 U5.3
NetR17_1: R17.1 U3.7 U4.21 | length 30
  Top Layer w0.254: R17.1 78.365,18.525 78.365,18.028 78.534,17.859 81.153,17.859 ; v1(81.153,18.669) 81.153,17.859 ; v1(84.836,30.48) 84.836,31.369 85.09,31.623 86.592,31.623 86.741,31.772 U4.21@86.741,33.183 ; U3.7@87.092,17.859 81.153,17.859
  Bottom Layer w0.254: v1(81.153,18.669) 81.153,20.066 81.407,20.32 84.582,20.32 84.836,20.574 v1(84.836,30.48)
NetR21_1: R21.1 U4.15 | length 33.5
  Top Layer w0.254: U4.15@83.82,33.183 83.82,29.867 83.969,29.718 v1(87.122,29.718) ; v1(101.346,31.242) 101.346,39.37 101.727,39.751 R21.1
  Bottom Layer w0.254: v1(87.122,29.718) 91.603,29.718 91.876,29.445 101.073,29.445 101.346,29.718 v1(101.346,31.242)
NetR21_2: R21.2 U6.2 | length 6.3
  Top Layer w0.254: R21.2 105.698,39.717 U6.2
NetR22_1: R22.1 U3.6 | length 8.9
  Top Layer w0.254: R22.1 v1(82.55,15.737) ; v1(83.82,18.669) 85.823,18.669 85.834,18.658 U3.6@86.392,18.658
  Bottom Layer w0.254: v1@82.55,15.875 82.55,18.415 82.804,18.669 v1(83.82,18.669)
NetR24_2: R24.2 U3.18 | length 15.5
  Top Layer w0.254: U3.18 97.028,21.189 97.282,20.935 97.282,18.31 97.431,18.161 101.981,18.161 102.235,17.907 R24.2@102.235,17.145
NetSB1_2: SB1.2 U4.13 | length 16.4
  Top Layer w0.254: SB1.2 76.581,28.321 76.867,28.607 76.867,29.242 77.095,29.47 82.655,29.47 82.804,29.619 U4.13@82.804,33.183
NetSB2_2: SB2.2 U4.14 | length 70.1
  Top Layer w0.254: v1(83.312,28.194) U4.14@83.312,33.183
  Bottom Layer w0.254: SB2.2 58.42,32.004 58.928,31.496 58.928,26.162 59.309,25.781 83.058,25.781 83.312,26.035 v1(83.312,28.194)
OUT: C6.2 D1.1 J3.1 Q2.5 R16.2 | length 39.4
  Top Layer w0.254: R16.2 47.879,15.505 C6.2 55.227,15.494 D1.1 55.372,4.572 J3.1 55.159,4.277 71.199,4.277 Q2.5@71.24,4.318
VBUS: C1.1 C21.1 J1.A4 R3.1 R5.2 R6.2 R9.2 R24.1 U2.1 U3.24 | length 148.3
  Top Layer w0.254: U2.1 13.646,14.076 20.365,14.076 C1.1 24.765,14.159 ; J1.A4@24.765,9.351 24.765,14.159 ; v1(24.765,19.285) 24.765,14.159 ; v1(75.311,24.384) 81.153,24.384 ; R5.2 81.153,24.384 ; v1(86.741,24.384) 81.153,24.384 ; U3.24 81.439,21.939 81.153,22.225 81.153,24.384 ; v1(93.345,20.32) 93.345,17.802 93.494,17.653 99.546,17.653 99.695,17.504 99.695,13.909 ; R3.1 97.665,13.97 ; R9.2 97.665,16.374 97.665,13.97 ; R24.1 102.235,13.909 ; R6.2 106.172,13.909 ; C21.1@110.162,15.039 C21.1 110.236,14.097 110.048,13.909 106.172,13.909 ; 97.665,13.97 97.726,13.909 99.695,13.909 ; 99.695,13.909 102.235,13.909 ; 102.235,13.909 106.172,13.909
  Bottom Layer w0.254: v1(24.765,19.285) 24.765,24.003 25.146,24.384 v1(75.311,24.384) ; v1(86.741,24.384) 92.964,24.384 93.345,24.003 v1(93.345,20.32)
pads on no net: J1.A8 J1.A9 J1.A12 J1.B8 J2.6 J3.2 J3.3 J4.2 J4.3 P1.6 P1.7 P1.8 P1.9 Q2.2 Q2.3 Q2.6 Q2.7 Q2.8 Q2.9 U3.3 U3.9 U3.11 U3.14 U3.15 U3.16 U3.17 U3.20 U3.25 U4.2 U4.3 U4.4 U4.5 U4.6 U4.16 U4.17 U4.18 U4.19 U4.20 U4.26 U4.27 U4.28 U4.30 U4.31 U4.38 U4.39 U4.40 U4.41 U4.45 U4.46
copper on no net:
  other v2: 4.445,2.413 143.256,2.413 5.08,63.373 143.129,64.389

## Other copper
Top Layer:
  rectangle net GND: 6.604,0.127 141.097,66.167
  rectangle: 146.304,-5.207 146.431,-5.08

## Silkscreen, mask and mechanical layers (free items; w line width, h text height)
Mechanical 1:
  the board outline again, w0.254